# Allegro board WCSA_SystemSchem.brd
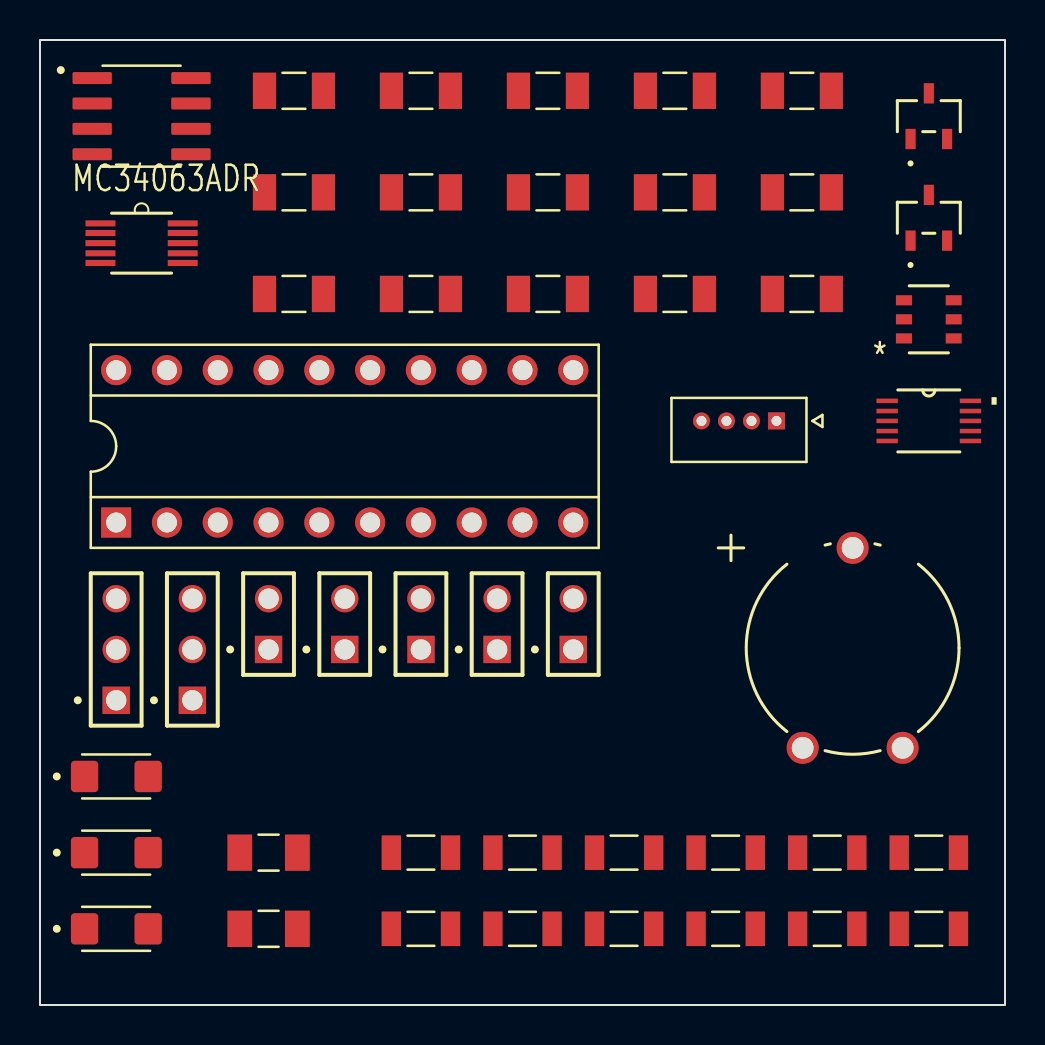
[diagram p0: board, top side]
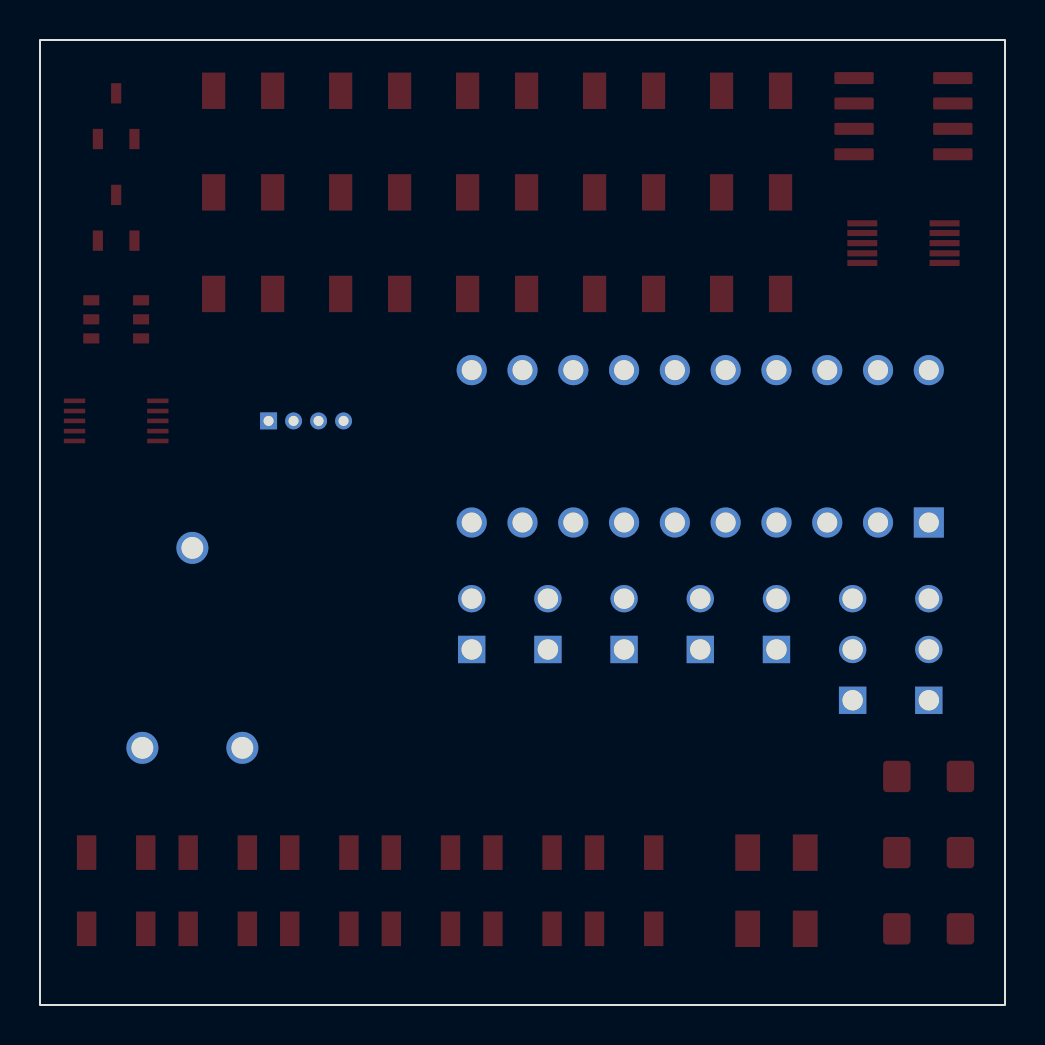
[diagram p1: board, bottom side, seen from below]

Outline 48.26 x 48.26 mm; copper layers: TOP, GND, DCV, BOTTOM. Coordinates in mm from the lower left corner of the outline.
Outline path: rectangle 0,0 48.26,48.26

## Design rules (mm)
constraint set DEFAULT: min track width 0.635

## Placement (name value [footprint] x y rotation side)
C1  100n  [CAPC3216X110N]  25.4 45.72 0 top
C2  10u  [CAPC3216X110N]  12.7 35.56 0 top
C3  10u  [CAPC3216X110N]  19.05 35.56 0 top
C4  100u  [CAPC3216X110N]  25.4 35.56 0 top
C5  1500p  [CAPC3216X110N]  31.75 35.56 0 top
C6  330u  [CAPC3216X110N]  38.1 35.56 0 top
C7  100n  [CAPC3216X110N]  31.75 45.72 0 top
C8  100n  [CAPC3216X110N]  38.1 45.72 0 top
C9  100n  [CAPC3216X110N]  38.1 40.64 0 top
C10  2.2u  [CAPC3216X110N]  31.75 40.64 0 top
C11  1u  [CAPC3216X110N]  25.4 40.64 0 top
C12  100n  [CAPC3216X110N]  19.05 40.64 0 top
C13  100n  [CAPC3216X110N]  12.7 40.64 0 top
C14  100n  [CAPC3216X110N]  19.05 45.72 0 top
C15  100u  [CAPC3216X110N]  12.7 45.72 0 top
D3  1N5819  [DIOSC190X340X116-2N]  3.81 11.43 0 top
D4  1N4001  [DIOSC190X340X116-2N]  3.81 7.62 0 top
D5  1N5819  [DIOSC190X340X116-2N]  3.81 3.81 0 top
J1  Jump2  [SAMTEC_MTSW-101-08-S-D-315]  15.24 17.78 0 top
J2  Jump2  [SAMTEC_MTSW-101-08-S-D-315]  22.86 17.78 0 top
J3  SIPSOC-3  [SAMTEC_TSW-101-24-G-T]  7.62 15.24 0 top
J4  LiDAR Header  [MOLEX_530470410]  36.83 29.21 0 top
J5  Jump2  [SAMTEC_MTSW-101-08-S-D-315]  19.05 17.78 0 top
J6  SIPSOC-3  [SAMTEC_TSW-101-24-G-T]  3.81 15.24 0 top
J7  Jump2  [SAMTEC_MTSW-101-08-S-D-315]  26.67 17.78 0 top
L3  170uH  [INDC3216X95N]  11.43 7.62 0 top
L4  1uH  [INDC3216X95N]  11.43 3.81 0 top
Q1  ZXMD63P02X/ZTX  [ZXM62P02E6TA_DIO]  44.45 34.29 0 top
Q2  ZXMD63N02X/ZTX  [SOT23_2P9X1P3_DIO]  44.45 44.45 0 top
Q3  ZXMD63N02X/ZTX  [SOT23_2P9X1P3_DIO]  44.45 39.37 0 top
R1  10k  [RESC3116X65N]  19.05 3.81 0 top
R2  100k  [RESC3116X65N]  19.05 7.62 0 top
R3  300k  [RESC3116X65N]  24.13 7.62 0 top
R4  100k  [RESC3116X65N]  29.21 7.62 0 top
R7  180  [RESC3116X65N]  34.29 7.62 0 top
R8  3.6k  [RESC3116X65N]  39.37 7.62 0 top
R9  1.2k  [RESC3116X65N]  44.45 7.62 0 top
R11  2k  [RESC3116X65N]  44.45 3.81 0 top
R12  1k  [RESC3116X65N]  39.37 3.81 0 top
R13  100k  [RESC3116X65N]  34.29 3.81 0 top
R14  4.7k  [RESC3116X65N]  29.21 3.81 0 top
R15  T100k  [TO_-102A2020-S_PHR]  40.64 22.86 0 top
RSC2  0.22  [RESC3116X65N]  24.13 3.81 0 top
SW1  Jump2  [SAMTEC_MTSW-101-08-S-D-315]  11.43 17.78 0 top
U1  PIC16F18345  [DIP-20-SOCKET]  15.24 27.94 0 top
U3  MCP7388T  [SOP50P490X110-10N]  5.08 38.1 0 top
U4  MC3x063A  [SOIC127P599X175-8N]  5.08 44.45 0 top
U9  LM4667  [MUB10A]  44.45 29.21 0 top

## Library data of the parts
C1-C15 = C1206C241MGGACAUTO7210_2
D3-D5 = 1N5819
J1 J2 J5 J7 SW1 = Jump2_0
J3 J6 = SIPSOC-3_1
J4 = SIPSOC-4_0
L3 L4 = L
Q1 = DIPSOC-3x2_1: User Part Number: PN; Tolerance: TOL
Q2 Q3 = ZXMD63N02X/ZTX: User Part Number: PN; Tolerance: TOL
R1-R4 R7-R9 R11-R14 RSC2 = RC1206JR-0713RL
R15 = POT: User Part Number: PN; Tolerance: TOL
U1 = DIP-20_1
U3 = DIPSOC-5x2_2
U4 = MC3x063A_8
U9 = DIPSOC-5x2_3: User Part Number: PN; Tolerance: TOL

## Footprints (pads in the part's own frame, mm; a bottom-side part is the same pattern mirrored in y, then rotated)
CAPC3216X110N
  rect 1.16x1.82 smd: 1(-1.475,0) 2(1.475,0)
DIOSC190X340X116-2N
  custom 1.37x1.57 smd: 1(-1.58,0) 2(1.6,0)
DIP-20-SOCKET
  rect 1.508x1.508 hole 1: 1(-11.43,-3.81)
  round 1.508 hole 1: 2(-8.89,-3.81) 3(-6.35,-3.81) 4(-3.81,-3.81) 5(-1.27,-3.81) 6(1.27,-3.81) 7(3.81,-3.81) 8(6.35,-3.81) 9(8.89,-3.81) 10(11.43,-3.81) 11(11.43,3.81) 12(8.89,3.81) 13(6.35,3.81) 14(3.81,3.81) 15(1.27,3.81) 16(-1.27,3.81) 17(-3.81,3.81) 18(-6.35,3.81) 19(-8.89,3.81) 20(-11.43,3.81)
INDC3216X95N
  rect 1.24x1.82 smd: 1(-1.44,0) 2(1.44,0)
MOLEX_530470410
  rect 0.85x0.85 hole 0.5: 1(0,0)
  round 0.85 hole 0.5: 2(-1.25,0) 3(-2.5,0) 4(-3.75,0)
MUB10A
  rect 1.067x0.229 smd: 1(-2.083,1.003) 2(-2.083,0.495) 3(-2.083,0) 4(-2.083,-0.508) 5(-2.083,-1.003) 6(2.083,-1.003) 7(2.083,-0.508) 8(2.083,0) 9(2.083,0.495) 10(2.083,1.003)
RESC3116X65N
  rect 0.97x1.73 smd: 1(-1.48,0) 2(1.48,0)
SAMTEC_MTSW-101-08-S-D-315
  rect 1.37x1.37 hole 1.02: 1(0,0)
  round 1.37 hole 1.02: 2(0,2.54)
SAMTEC_TSW-101-24-G-T
  rect 1.37x1.37 hole 1.02: 1(0,0)
  round 1.37 hole 1.02: 2(0,2.54) 3(0,5.08)
SOIC127P599X175-8N
  custom 1.97x0.6 smd: 1(-2.47,1.905) 2(-2.47,0.635) 3(-2.47,-0.635) 4(-2.47,-1.905) 5(2.47,-1.905) 6(2.47,-0.635) 7(2.47,0.635) 8(2.47,1.905)
SOP50P490X110-10N
  rect 1.499x0.305 smd: 1(-2.057,0.991) 2(-2.057,0.508) 3(-2.057,0) 4(-2.057,-0.508) 5(-2.057,-0.991) 6(2.057,-0.991) 7(2.057,-0.508) 8(2.057,0) 9(2.057,0.508) 10(2.057,0.991)
SOT23_2P9X1P3_DIO
  rect 0.508x1.016 smd: 1(0.914,-1.143) 2(-0.914,-1.143) 3(0,1.143)
TO_-102A2020-S_PHR
  round 1.6 hole 1.092: 1(0,0) 2(-2.5,-10) 3(2.5,-10)
ZXM62P02E6TA_DIO
  rect 0.802x0.508 smd: 1(-1.245,0.953) 2(-1.245,0) 3(-1.245,-0.953) 4(1.245,-0.953) 5(1.245,0) 6(1.245,0.953)

## Nets
+5V: C14.1 C15.1 J4.4 J6.3 L4.2
GND: C1.1 C2.2 C3.2 C4.2 C5.2 C6.2 C7.2 C8.2 C13.2 C14.2 C15.2 J1.1 J2.1 J3.1 J4.1 Q2.1(S) Q3.1(S) R9.1 R11.1 R13.2 R15.3 SW1.1 U1.20 U3.5(VSS) U4.2 U4.4 U9.2 U9.7 U9.8
VBAT: C3.1 C9.1 J2.2(PIN2) Q1.4(S) R1.2 R2.2 U3.9 U3.10
VDD: C1.2 C4.1 C8.1 J6.1 RSC2.1 U1.1 U4.6(VCC) U9.9
RA2-CCP3: D4.2 R3.1 R4.1 U1.17
RA4-CCP4: R14.2 U1.3
RB5-RX: J3.2 J4.3 U1.12
RB7-SPKR_SD: U1.10 U9.1
RC1-PWM5: R12.2 U1.15
RC4-TX: J3.3 J4.2 U1.6
RC6-SPKR_G: U1.8 U9.5
VCHG: C2.1 C7.1 J1.2(PIN2) U3.1 U3.2
N11607: R11.2 U3.6
N12112: L3.1 R7.2 RSC2.2 U4.7
N12132: D3.2 L3.2 U4.1
N12244: C6.1 D3.1(CAT) L4.1 R8.1
N12286: R8.2 R9.2 U4.5
N14206: C5.1 U4.3
N88813: C10.1 Q1.1 Q1.2 Q1.5 Q1.6 R4.2
N88931: C9.2 C11.2 Q1.3 Q2.3 R2.1
N88985: C10.2 Q2.2 R3.2
N92811: C11.1 D4.1(CAT) R1.1 SW1.2(PIN2)
N99325: Q3.2 R12.1 R13.1
N99590: C12.2 D5.1(CAT) J5.1 Q3.3
N99769: C12.1 D5.2 J5.2(PIN2) J6.2
N102392: C13.1 R14.1 R15.1
N102677: R15.2(WIPER) U9.4
N102956: J7.2(PIN2) U9.10(VO2)
N102963: J7.1 U9.6
N121987: R7.1 U4.8

Pads without a net: U1 2 4 5 7 9 11 13 14 16 18 19; U3 3 4 7 8; U9 3
